# Altium PCB PCB1 - Copy.PcbDoc (part 1 of 2)
Units mil, origin at the board's own origin, x right, y up, seen from the top; angles counter-clockwise.
Board outline 4250 x 4000 mil, 2 copper layers (Top Layer, Bottom Layer); 130 components, 77 nets, 452 pads, 327 vias.
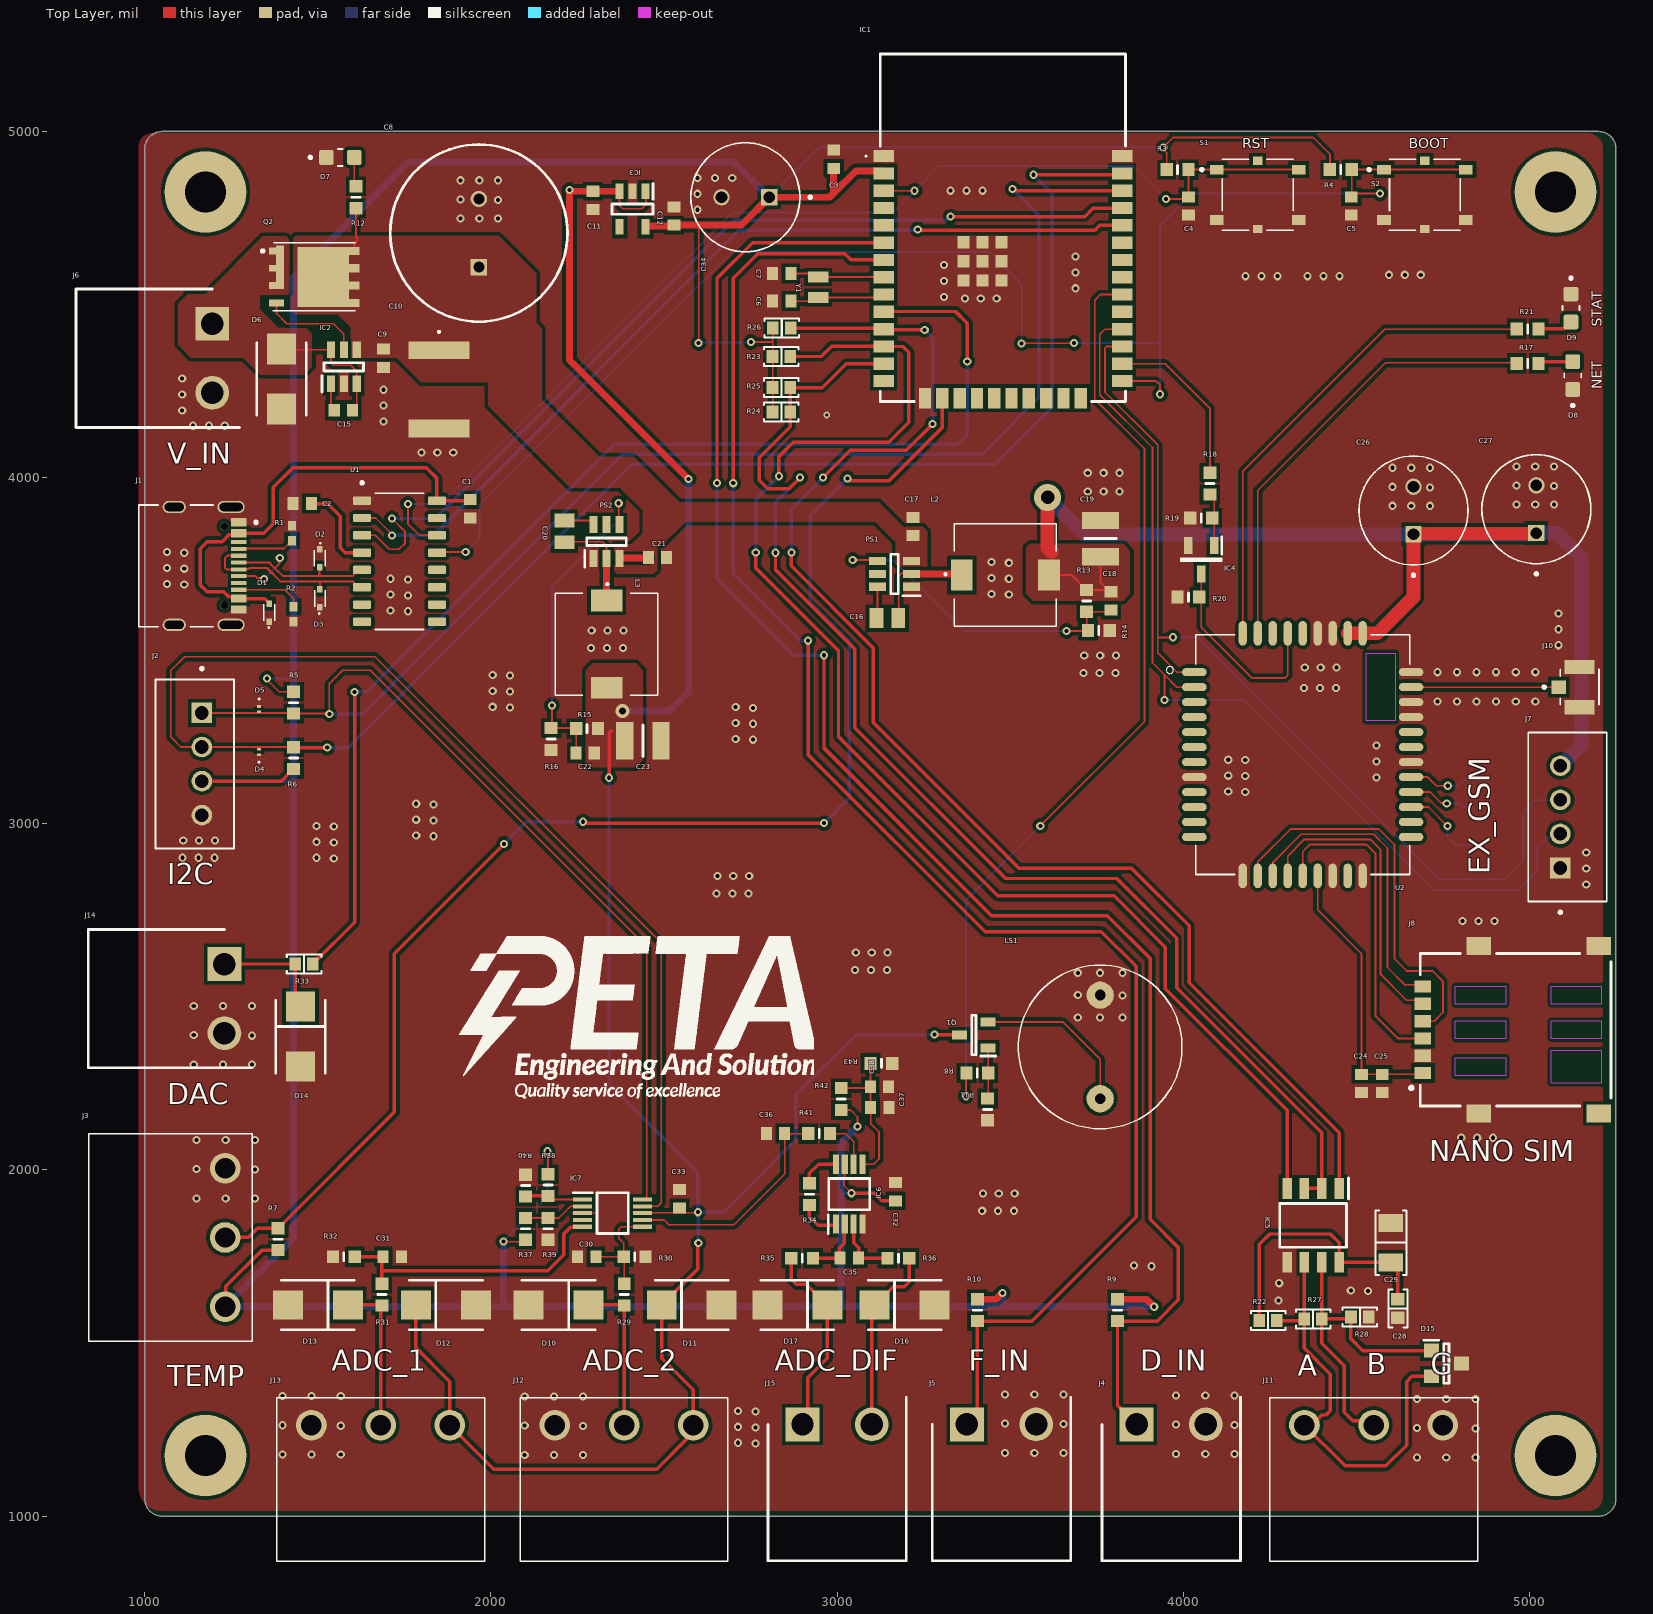
[diagram p0: Top Layer view]
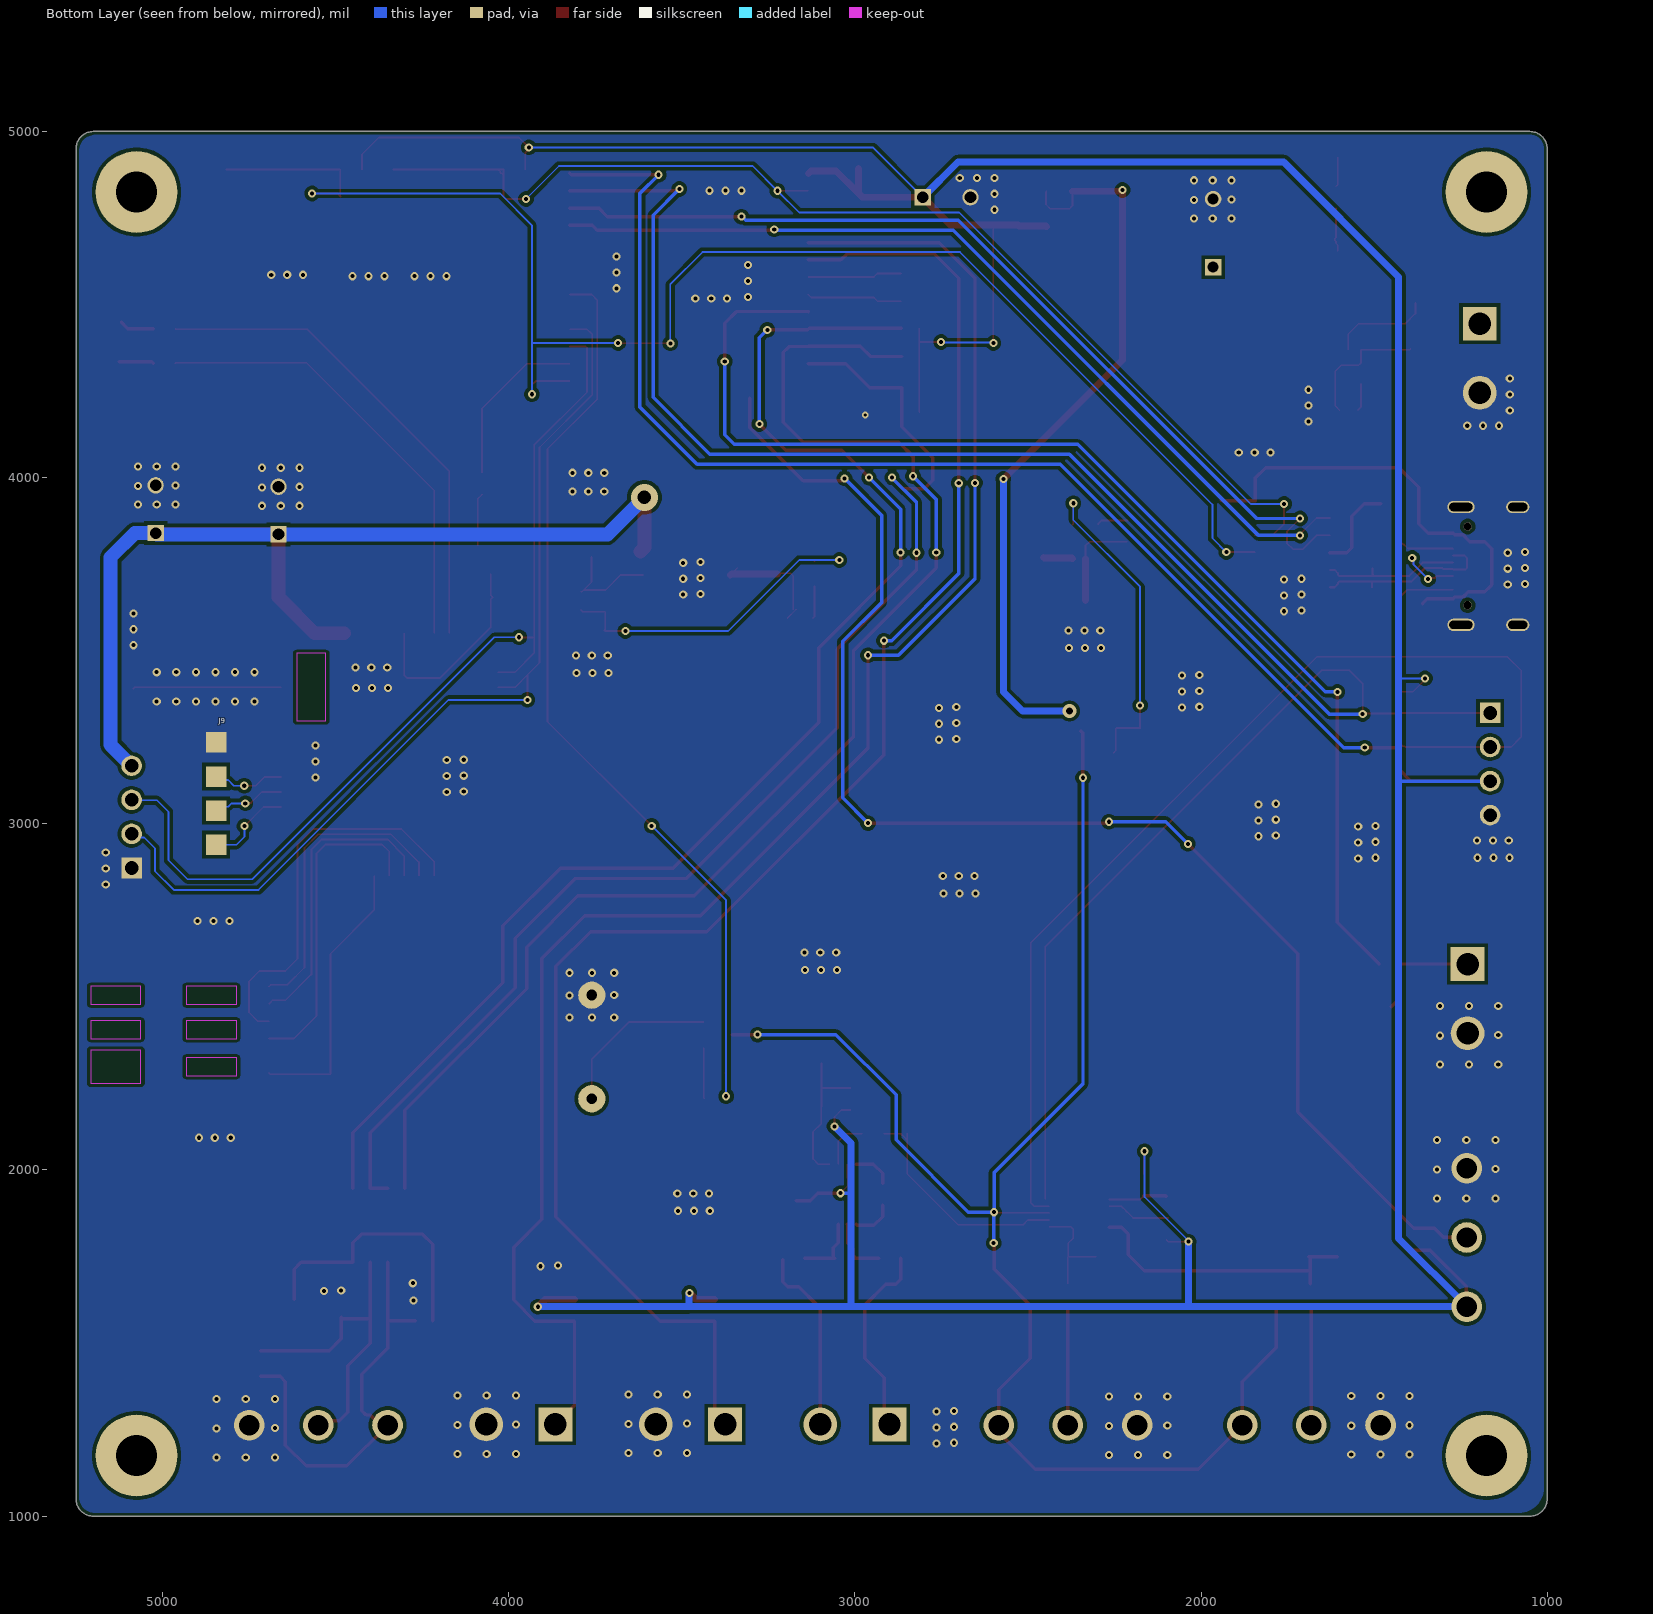
[diagram p1: Bottom Layer view, seen from below]
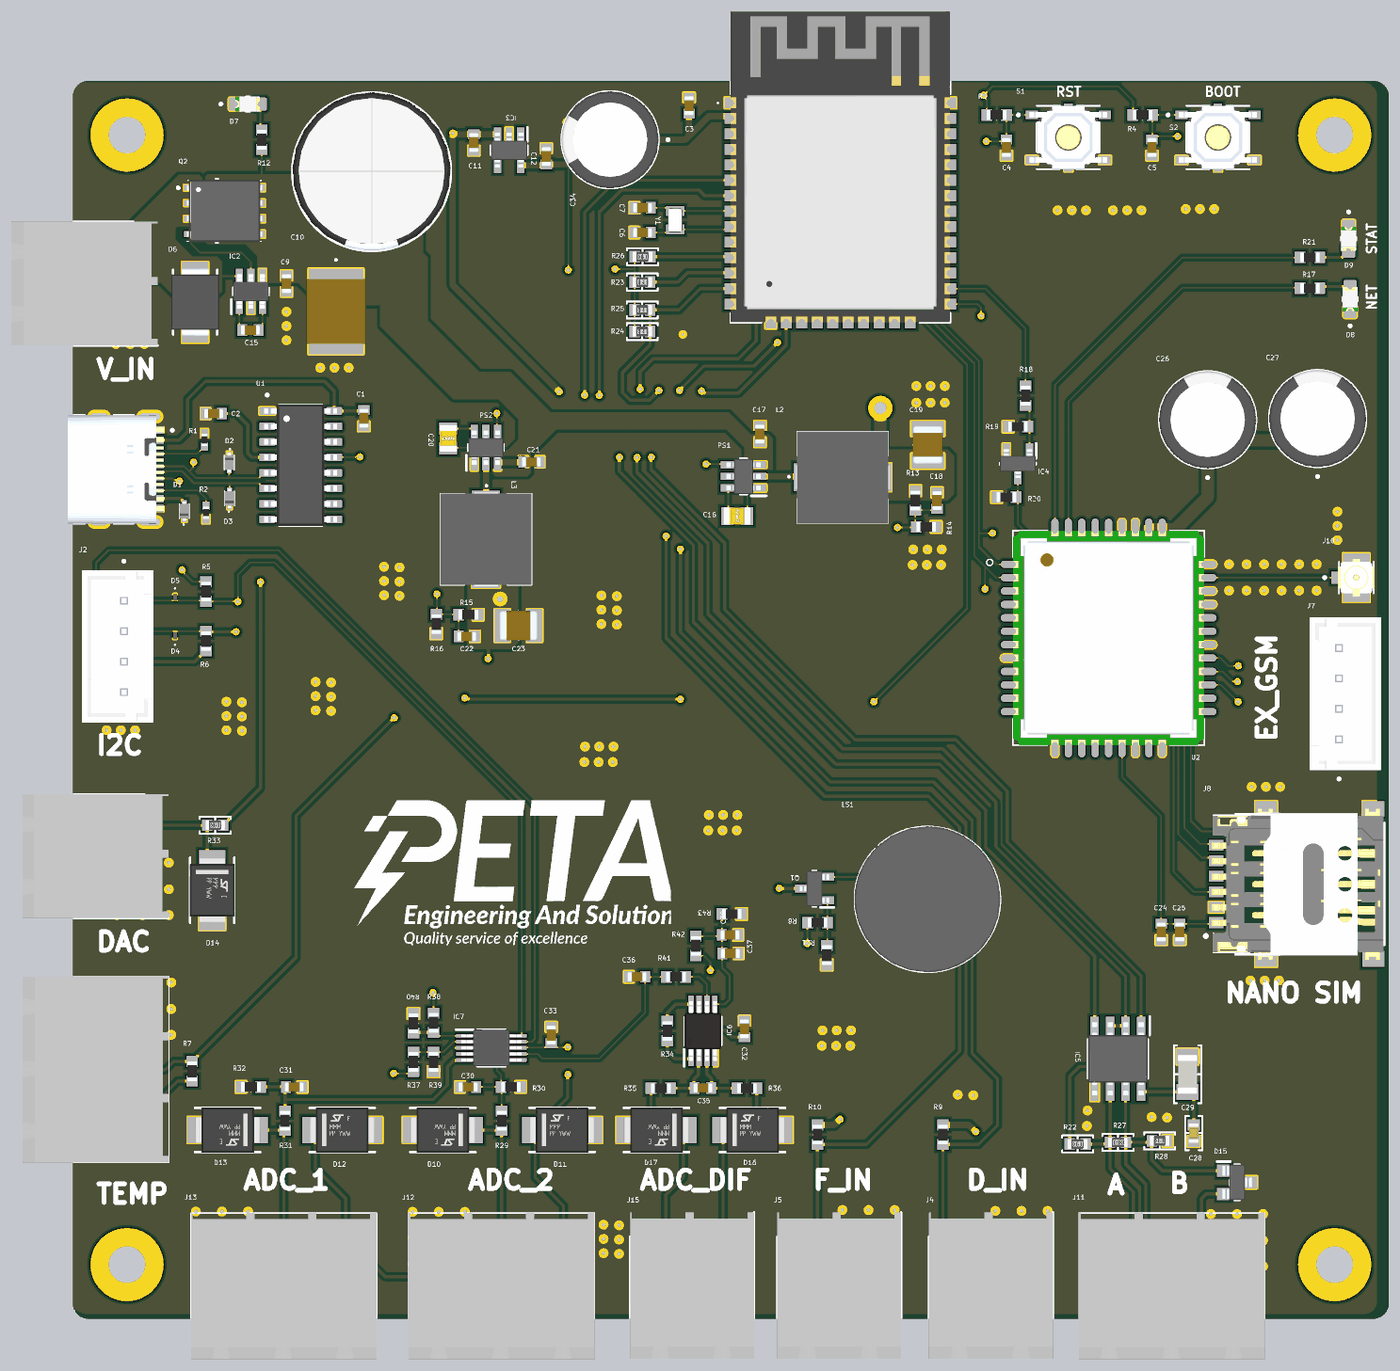
[diagram p3: 3D render of the assembled board from above, using the file's embedded part models]

## Layer stack, top to bottom
Top Solder: solder mask 0.4, Solder Resist, Dk 3.5
Top Layer: signal copper 1.4
Dielectric 1: dielectric 12.6, FR-4, Dk 4.8
Bottom Layer: signal copper 1.4
Bottom Solder: solder mask 0.4, Solder Resist, Dk 3.5

## Board outline
1050,1000 cw(c1050,1050) 1000,1050 1000,4950 cw(c1050,4950) 1050,5000 5200,5000 cw(c5200,4950) 5250,4950 5250,1050 cw(c5200,1050) 5200,1000

## Design rules (kind name [scope] priority, off if disabled: settings)
Clearance [All] p1: gap=10 ignorepadtopadclearanceinfootprint=FALSE except(0: Arc-Hole Track-Hole SMDPad-Hole THPad-Hole Via-Hole Fill-Hole Poly-Hole Region-Hole Text-Hole)
DiffPairsRouting [All] p1: maxlimit=19.68 minlimit=5.91 mostfreqgap=10 toplayer_minwidth=5.91 toplayer_maxwidth=15 toplayer_prefwidth=15 bottomlayer_minwidth=5.91 bottomlayer_maxwidth=15 bottomlayer_prefwidth=15 maxuncoupledlength=500
PlaneConnect [All] p1: planeconnectstyle=Direct reliefexpansion=20 reliefentries=4 reliefconductorwidth=10 reliefairgap=10
PolygonConnect [All] p1: connectstyle=Direct reliefconductorwidth=10 reliefentries=4 polygonreliefangle="90 Angle" airgapwidth=10
RoutingVias [All] p1: holewidth=11.81 width=23.62 viastyle="Through Hole" minholewidth=11.81 minwidth=23.62 maxholewidth=118.11 maxwidth=236.22
SolderMaskExpansion [All] p1: expansion=4 istentingtop=FALSE
Width [All] p1: maxlimit=80 minlimit=5 preferedwidth=10
28 further rules are at their usual default settings.

## Classes and differential pairs
component class DAC_OUT: D14 J14 R33
component class RS485: C28 C29 D15 IC5 J11 R22 R23 R24 R25 R26 R27 R28
component class PWR: C8 C9 C10 C11 C12 C15 C16 C17 C18 C19 C20 C21 C22 C23 D6 D7 IC2 IC3 J6 L2 L3 PS1 PS2 Q2 R12 R13 R14 R15 R16
component class programmer: C1 C2 D1 D2 D3 J1 R1 R2 U1
component class MCU: C3 C4 C5 C6 C7 C34 D4 D5 IC1 J2 J3 J4 J5 LS1 Q1 R3 R4 R5 R6 R7 R8 R9 R10 R11 S1 S2 Y1
component class GSM: C24 C25 C26 C27 D8 D9 IC4 J7 J8 J9 J10 R17 R18 R19 R20 R21 U2
component class ADC: C30 C31 C32 C33 C35 C36 C37 C38 D10 D11 D12 D13 D16 D17 IC6 IC7 J12 J13 J15 R29 R30 R31 R32 R34 R35 R36 R37 R38 R39 R40 R41 R42 R43
differential pair USB: +USB_P -USB_N

## Components (designator, comment, footprint, x,y, rotation, side; value= is the part's Value field where it differs from the comment)
C1 "0.1 uF" CAP0603 1940,3910 r90 top
C2 "0.1 uF" CAP0603 1455,3925 r0 top
C3 "0.1 uF" CAP0603 2990,4920 r90 top
C4 "0.1 uF" CAP0603 4015,4785 r270 top
C5 "0.1 uF" CAP0603 4485,4785 r270 top
C6 "1.5 pF" CAP0603 2840,4510 r0 top
C7 "1.5 pF" CAP0603 2840,4590 r0 top
C8 "MAL213651471E3" CAPPRD500W60D1300H2700 1965,4608.15 r90 top
C9 "2.2 uF" CAP0603 1690,4345 r90 top
C10 "C5750X5R1H106K230KA" C5750_Commercial 1850,4255 r270 top
C11 "2.2 uF" CAP0603 2295,4801 r270 top
C12 "2.2 uF" CAP0603 2529,4756 r90 top
C15 "0.1 uF" CAP0603 1573.62,4195 r180 top
C16 "C0805C104M5RAC-TU" CAPC2012X88N 3145,3594 r180 top
C17 "C5750X5R1H106K230KA" CAP0603 3219,3859 r270 top
C18 "GRM0335C1E560JA01D" CAP0603 3791,3644 r90 top
C19 "GRM32ER61C476KE15L" CAPC3225X270N 3761,3824 r270 top
C20 "C0805C104M5RAC-TU" CAPC2012X88N 2212,3845 r90 top
C21 "C5750X5R1H106K230KA" CAP0603 2481,3769 r180 top
C22 "CGA1A2C0G1E820J030BA" CAP0603 2272,3205 r0 top
C23 "GRM32ER61C476KE15L" CAPC3225X270N 2439,3240 r180 top
C24 "2.2 uF" CAP0603 4515,2250 r90 top
C25 "2.2 uF" CAP0603 4575,2250 r90 top
C26 "470 uF" CAPPRD350W60D800H1150 4665,3905 r90 top
C27 "470 uF" CAPPRD350W60D800H1150 5020,3908.9 r90 top
C28 "0.1 µF" "CAP 0603_1608" 4620,1600 r90 top
C29 "10µF" "CAP 1206_3216 - 1.8MM" 4600,1790 r270 top
C30 "0.1 uF" CAP0603 2276.89,1749.06 r180 top locked
C31 "0.1 uF" CAP0603 1715,1749.06 r0 top locked
C32 "0.1 uF" CAP0603 3169,1937 r90 top
C33 "0.1 uF" CAP0603 2545,1917 r90 top
C34 "470 uF" CAPPRD350W60D800H1150 2735,4810 r180 top
C35 "0.1 uF" CAP0603 3035,1746 r0 top
C36 "10 uF" CAP0603 2822,2105.2 r180 top
C37 "10 uF" CAP0603 3123.44,2180.5 r0 top
C38 "0.1 uF" CAP0603 3122.44,2240.5 r0 top
D1 "LESD5D5.0CT1G" LESD5D50CT1G 1360,3610 r90 top
D2 "LESD5D5.0CT1G" LESD5D50CT1G 1505,3767 r270 top
D3 "LESD5D5.0CT1G" LESD5D50CT1G 1506,3651 r90 top
D4 "DESD3V3Z1BCSF-7" DESD3V3Z1BCSF7 1330,3207.87 r90 top
D5 "DESD3V3Z1BCSF-7" DESD3V3Z1BCSF7 1330,3331.13 r270 top
D6 "SMBJ24CA-13-F" DIONM5336X250N 1395,4285 r270 top
D7 "LED_SMD" LEDSC125X200X90-2N 1565,4925 r0 top
D8 "LED_SMD" LEDSC125X200X90-2N 5125,4295 r90 top
D9 "LED_SMD" LEDSC125X200X90-2N 5120,4490 r270 top
D10 "SMBJ5.0A" SMBJ12A 2195,1610 r180 top locked
D11 "SMBJ5.0A" SMBJ12A 2580,1610 r0 top locked
D12 "SMBJ5.0A" SMBJ12A 1870,1610 r0 top locked
D13 "SMBJ5.0A" SMBJ12A 1500,1610 r180 top locked
D14 "SMBJ5.0A" SMBJ12A 1450,2385 r270 top
D15 "SM712" SOT95P240X115-3N 4760,1441 r0 top
D16 "SMBJ5.0A" SMBJ12A 3195,1610 r0 top locked
D17 "SMBJ5.0A" SMBJ12A 2885,1610 r180 top locked
IC1 "ESP32-WROOM-32E-N8" ESP32WROOM32EN8 3478.94,4721.85 r0 top
IC2 "LM74700QDBVTQ1" SOT95P280X145-6N 1575,4320 r90 top
IC3 "AP2112K-1.2TRG1" SOT95P285X140-5N 2409,4776 r270 top
IC4 "MMBT2222ALT1G" SOT96P237X111-3N 4052,3763 r270 top
IC5 "MAX485ECSA+" SOIC127P600X175-8N 4375,1840 r270 top
IC6 "INA317IDGKR" SOP65P490X110-8N 3035,1930 r90 top
IC7 "ADS1115IDGSR" SOP50P490X110-10N 2351.61,1875.32 r0 top
J1 "TYPE-C-31-M-12" HRO_TYPE-C-31-M-12 1085,3745 r270 top
J2 "DISPLAY" JST_B4B-XH-A(LF)(SN) 1144.33,3172.64 r90 top locked
J3 "DS18B20/PT100" 2828153 1231.97,2005 r270 top locked
J4 "Digital" SHDRRA2W102P0X508_1X2_1016X1200X850P 3865,1265 r180 top locked
J5 "FLOAT SNS" SHDRRA2W102P0X508_1X2_1016X1200X850P 3375,1265 r180 top locked
J6 "282815-2" SHDRRA2W102P0X508_1X2_1016X1200X850P 1195,4445 r90 top
J7 "EX_SIM" JST_B4B-XH-A(LF)(SN) 5110,3020 r270 top
J8 "SIM8060-6-1-14-00-A" GCT_SIM8060-6-1-14-00-A 4960,2405 r90 top
J9 "SMD_SWD" SMD_SWD 4846.98,3234.78 r270 bottom
J10 "CONUFL001-SMD" LINX_CONUFL001-SMD 5145,3395 r270 top
J11 "282815-3" 2828153 4350,1263.03 r0 top locked
J12 "282815-3" 2828153 2184.7,1263.03 r0 top locked
J13 "282815-3" 2828153 1481.36,1263.03 r0 top locked
J14 "282815-2" SHDRRA2W102P0X508_1X2_1016X1200X850P 1230,2595 r90 top locked
J15 "282815-2" SHDRRA2W102P0X508_1X2_1016X1200X850P 2900,1265 r180 top locked
L2 "PA4302.103NLT" PA4302103NLT 3486,3719 r90 top
L3 "PA4302.103NLT" PA4302103NLT 2334,3519.02 r0 top
LS1 "CMI-1295IC-0585T" CMI1295IC0585T 3760,2205.79 r90 top
PS1 "TPS54202DDCR" SOT95P280X110-6N 3166,3722 r180 top
PS2 "TPS54202DDCR" SOT95P280X110-6N 2334,3815 r90 top
Q1 "DMG3415U-7" SOT96P240X110-3N 3395,2390 r180 top
Q2 "BSC014N06NSATMA1" BSC010N04LS6ATMA1 1490,4580 r270 top
R1 "CRCW0402100KFKEDHP" RESC1005X40N 1425.16,3840 r90 top
R2 "CRCW0402100KFKEDHP" RESC1005X40N 1430,3605 r90 top
R3 "10K" RES0603 3983.5,4890 r180 top
R4 "10K" RES0603 4455,4890 r180 top
R5 "4.7K" RES0603 1430,3350 r90 top
R6 "4.7K" RES0603 1430,3190 r270 top
R7 "4.7K" RES0603 1385,1800 r270 top
R8 "300R" RES0603 3405,2280 r180 top
R9 "4.7K" RES0603 3810,1595 r90 top
R10 "4.7K" RES0603 3405,1595 r90 top
R11 "10K" RES0603 3435,2175 r270 top
R12 "1K" RES0603 1610,4810 r90 top
R13 "CRCW0402100KFKEDHP" RES0603 3721,3644 r90 top
R14 "CRCW040216K9FKEDHP" RES0603 3756,3559 r180 top
R15 "CRCW0402100KFKEDHP" RES0603 2277.5,3275 r0 top
R16 "CRCW040213K7FKEDHP" RES0603 2174,3245 r90 top
R17 "1K" RES0603 4995,4330 r0 top
R18 "4.7K" RES0603 4077,3983 r90 top
R19 "47K" RES0603 4052,3883 r0 top
R20 "NC" RES0603 4015,3655 r180 top
R21 "1K" RES0603 4995,4430 r0 top
R22 "20 kOhms" "RES 0603_1608" 4245,1565 r180 top
R23 "10 kOhms" "RES 0603_1608" 2839,4350 r180 top
R24 "10 kOhms" "RES 0603_1608" 2839,4190 r180 top
R25 "10 kOhms" "RES 0603_1608" 2839,4260 r180 top
R26 "10 kOhms" "RES 0603_1608" 2840,4432 r180 top
R27 "120" "RES 0603_1608" 4375,1570 r0 top
R28 "20 kOhms" "RES 0603_1608" 4510,1575 r180 top
R29 "68k" RES0603 2385,1640 r90 top locked
R30 "10K" RES0603 2415,1749.25 r0 top locked
R31 "68k" RES0603 1685,1640 r90 top locked
R32 "10K" RES0603 1575,1749.25 r180 top locked
R33 "10 kOhms" "RES 0603_1608" 1460,2595 r180 top
R34 "100R" RES0603 2920,1930 r90 top
R35 "100R" RES0603 2899,1745 r0 top
R36 "100R" RES0603 3177,1745 r180 top
R37 "10K" RES0603 2100,1830 r90 top
R38 "10K" RES0603 2165,1956.5 r270 top
R39 "NC" RES0603 2165,1830 r270 top
R40 "NC" RES0603 2100,1955 r90 top
R41 "10K" RES0603 2948,2105 r180 top
R42 "10K" RES0603 3012,2205 r270 top
R43 "10K" RES0603 3128,2308 r180 top
S1 "PTS526_SMG15_SMTR2_LFS" SW_PTS526_SMG15_SMTR2_LFS 4215,4817.17 r0 top
S2 "PTS526_SMG15_SMTR2_LFS" SW_PTS526_SMG15_SMTR2_LFS 4698.11,4817.17 r0 top
U1 "CH340C" SOIC127P600X180-16N 1735.78,3758.43 r0 top
U2 "SIM800C" LCC110P1570X1760X250-42N 4345,3200 r0 top
Y1 "CM8V-T1A-32.768KHZ-6PF-20PPM-TA-QC" XTAL_CM8V-T1A-32.768KHZ-6PF-20PPM-TA-QC 2945,4550 r270 top

## Footprints (in the part's own frame and the unit in brackets; to place one, negate y for a bottom-side part, rotate by r counter-clockwise, add the part's x,y. Pads: shape width x height; smd on the part's side, far side on the other; paste and mask are expansions set on the pad)
2828153 [mm]
  round 2.25 hole 1.5: 1(0,0) 2(5.08,0) 3(10.16,0)
  silkscreen extent -2.54,-10 12.7,2, body extent -2.54,-10 12.7,2, height 8.46
BSC010N04LS6ATMA1 [mm]
  rect 0.5x0.5 smd: 1(-1.905,-3.075) 2(-0.635,-3.075) 3(0.635,-3.075)
  rect 0.5x1.1 smd: 4(1.905,-2.775)
  rect 0.6x0.8 smd: 5(1.905,2.925) 6(0.635,2.925) 7(-0.635,2.925) 8(-1.905,2.925)
  rect 4.41x3.75 smd: 9(0,0.65)
  rect 3.2x0.6 smd: 10(-0.715,-2.525)
  silkscreen extent -2.5,-3.9 2.5,3, body extent -2.7,-3.08 2.7,3.08, height 1.1
C5750_Commercial [mm]
  rect 1.3x4.5 smd: 1(-2.875,0) 2(2.875,0)
  silkscreen extent -4.27,-0.05 -4.18,0.05, body extent -2.65,-2.45 2.65,2.45, height 2.77
CAP0603 [mm]
  rect 0.81x0.94 smd: 1(-0.67,0) 2(0.67,0)
  body extent -0.8,-0.4 0.8,0.4, height 0.9
"CAP 0603_1608" [mm]
  rect 0.9x1 smd: 1(-0.675,0) 2(0.675,0)
  silkscreen extent -1.4,-0.7 1.4,0.7, body extent -0.8,-0.41 0.8,0.41, height 0.82
"CAP 1206_3216 - 1.8MM" [mm]
  rect 1.3x1.8 smd: 1(-1.45,0) 2(1.45,0)
  silkscreen extent -2.37,-1.12 2.37,1.12, body extent -1.6,-0.8 1.6,0.8, height 1.8
CAPC2012X88N [mm]
  rect 1.02x1.47 smd: 1(-0.8,0) 2(0.8,0)
  body extent -1.1,-0.73 1.1,0.72, height 0.88
CAPC3225X270N [mm]
  rect 1.26x2.72 smd: 1(-1.33,0) 2(1.33,0)
  silkscreen extent 0,-1.15 0,1.15, body extent -1.6,-1.25 1.6,1.25, height 2.7
CAPPRD350W60D800H1150 [mm]
  round 1.2 hole 0.85: N(1.75,0)
  rect 1.2x1.2 / inner round 1.2 / far side rect 1.2x1.2 hole 0.85: P(-1.75,0)
  silkscreen extent -4.85,-4 4,4, body extent -4,-4 4,4, height 11.5
CAPPRD500W60D1300H2700 [mm]
  rect 1.2x1.2 hole 0.8: 1(0,0)
  round 1.2 hole 0.8: 2(5,0)
  silkscreen extent -4,-6.5 9,6.5, body extent -3.96,-6.49 9.03,6.49, height 25
CMI1295IC0585T [mm]
  round 2 hole 0.8: 1(0,0) 2(7.6,0)
  silkscreen extent -2.2,-6 9.8,6, body extent -2.19,-5.99 9.81,6, height 9.63
DESD3V3Z1BCSF7 [mm]
  rect 0.194x0.291 smd: 1(-0.2,0) 2(0.2,0)
  silkscreen extent -0.8,-0.05 -0.7,0.05, body extent -0.3,-0.15 0.3,0.15, height 0.42
DIONM5336X250N [mm]
  rect 2.25x2.15 smd: 1(-2.2,0) 2(2.2,0)
  silkscreen extent -2.65,-1.81 2.65,1.81, body extent -2.8,-1.97 2.8,1.97, height 2.57
ESP32WROOM32EN8 [mm]
  rect 1.5x0.9 smd: 1(-8.75,5.26) 2(-8.75,3.99) 3(-8.75,2.72) 4(-8.75,1.45) 5(-8.75,0.18) 6(-8.75,-1.09) 7(-8.75,-2.36) 8(-8.75,-3.63) 9(-8.75,-4.9) 10(-8.75,-6.17) 11(-8.75,-7.44) 12(-8.75,-8.71) 13(-8.75,-9.98) 14(-8.75,-11.25) 25(8.75,-11.25) 26(8.75,-9.98) 27(8.75,-8.71) 28(8.75,-7.44) 29(8.75,-6.17) 30(8.75,-4.9) 31(8.75,-3.63) 32(8.75,-2.36) 33(8.75,-1.09) 34(8.75,0.18) 35(8.75,1.45) 36(8.75,2.72) 37(8.75,3.99) 38(8.75,5.26)
  rect 0.9x1.5 smd: 15(-5.715,-12.5) 16(-4.445,-12.5) 17(-3.175,-12.5) 18(-1.905,-12.5) 19(-0.635,-12.5) 20(0.635,-12.5) 21(1.905,-12.5) 22(3.175,-12.5) 23(4.445,-12.5) 24(5.715,-12.5)
  rect 0.9x0.9 smd: 39(-2.9,-1.06) 40(-2.9,-2.46) 41(-2.9,-3.86) 42(-1.5,-3.86) 43(-0.1,-3.86) 44(-0.1,-2.46) 45(-0.1,-1.06) 46(-1.5,-1.06) 47(-1.5,-2.46)
  silkscreen extent -10.1,-12.75 9,12.75, body extent -9,-12.75 9,12.75, height 3.13
GCT_SIM8060-6-1-14-00-A [mm]
  rect 0.9x1.2 smd: C1(-3.175,6.8) C2(-0.635,6.8) C3(1.905,6.8) C5(-1.905,6.8) C6(0.635,6.8) C7(3.175,6.8)
  rect 1.3x1.8 smd: S1(-6.15,2.7) S2(6.15,2.7) S3(6.15,-6.1) SW(-6.15,-6.1)
  Keep-Out Layer region: 3.19,-6.3 1.89,-6.3 1.89,-2.6 3.19,-2.6
  Keep-Out Layer region: 0.65,-6.3 -0.65,-6.3 -0.65,-2.6 0.65,-2.6
  Keep-Out Layer region: -1.49,-6.3 -3.93,-6.3 -3.93,-2.6 -1.49,-2.6
  Keep-Out Layer region: 3.19,0.72 1.89,0.72 1.89,4.42 3.19,4.42
  Keep-Out Layer region: 0.65,0.72 -0.65,0.72 -0.65,4.42 0.65,4.42
  Keep-Out Layer region: -2.06,0.72 -3.36,0.72 -3.36,4.42 -2.06,4.42
  Keep-Out Layer region: 3.19,-6.3 1.89,-6.3 1.89,-2.6 3.19,-2.6
  Keep-Out Layer region: 0.65,-6.3 -0.65,-6.3 -0.65,-2.6 0.65,-2.6
  Keep-Out Layer region: -1.49,-6.3 -3.93,-6.3 -3.93,-2.6 -1.49,-2.6
  Keep-Out Layer region: 3.19,0.72 1.89,0.72 1.89,4.42 3.19,4.42
  Keep-Out Layer region: 0.65,0.72 -0.65,0.72 -0.65,4.42 0.65,4.42
  Keep-Out Layer region: -2.06,0.72 -3.36,0.72 -3.36,4.42 -2.06,4.42
  silkscreen extent -5.6,-7 5.6,7.76, body extent -6.22,-6.92 6.18,7.18, height 1.4
HRO_TYPE-C-31-M-12 [mm]
  rect 0.6x1.14 smd mask+0.05: A1_B12(-3.2,4.75) A4_B9(-2.4,4.75) B1_A12(3.2,4.75) B4_A9(2.4,4.75)
  rect 0.3x1.14 smd mask+0.05: A5(-1.25,4.75) A6(-0.25,4.75) A7(0.25,4.75) A8(1.25,4.75) B5(1.75,4.75) B6(0.75,4.75) B7(-0.75,4.75) B8(-1.75,4.75)
  oval 0.9x2 hole 0.6 slot 1.7 at 90 deg: S1(-4.325,4.17) S2(4.325,4.17)
  oval 0.9x1.7 hole 0.6 slot 1.4 at 90 deg: S3(-4.325,0) S4(4.325,0)
  round 0.6 hole 0.6 unplated: ""(-2.89,3.68) ""(2.89,3.68)
  silkscreen extent -4.47,-2.6 4.47,6.1, body extent -4.47,-2.6 4.47,5.31, height 3.31
JST_B4B-XH-A(LF)(SN) [mm]
  rect 1.508x1.508 / inner round 1.508 / far side rect 1.508x1.508 hole 1: 1(3.75,-0.525)
  round 1.508 hole 1: 2(1.25,-0.525) 3(-1.25,-0.525) 4(-3.75,-0.525)
  silkscreen extent -6.2,-2.88 7.1,2.88, body extent -6.2,-2.88 6.2,2.88, height 7
LCC110P1570X1760X250-42N [mm]
  oval 1.8x0.6 smd: 1(-7.95,6.05) 2(-7.95,4.95) 3(-7.95,3.85) 4(-7.95,2.75) 5(-7.95,1.65) 6(-7.95,0.55) 7(-7.95,-0.55) 8(-7.95,-1.65) 9(-7.95,-2.75) 10(-7.95,-3.85) 11(-7.95,-4.95) 12(-7.95,-6.05) 22(7.95,-6.05) 23(7.95,-4.95) 24(7.95,-3.85) 25(7.95,-2.75) 26(7.95,-1.65) 27(7.95,-0.55) 28(7.95,0.55) 29(7.95,1.65) 30(7.95,2.75) 31(7.95,3.85) 32(7.95,4.95) 33(7.95,6.05)
  oval 0.6x1.8 smd: 13(-4.4,-8.9) 14(-3.3,-8.9) 15(-2.2,-8.9) 16(-1.1,-8.9) 17(0,-8.9) 18(1.1,-8.9) 19(2.2,-8.9) 20(3.3,-8.9) 21(4.4,-8.9) 34(4.4,8.9) 35(3.3,8.9) 36(2.2,8.9) 37(1.1,8.9) 38(0,8.9) 39(-1.1,8.9) 40(-2.2,8.9) 41(-3.3,8.9) 42(-4.4,8.9)
  Keep-Out Layer region: 6.8,2.483 4.656,2.483 4.656,7.43 6.8,7.43
  silkscreen extent -10,-8.8 7.85,8.8, body extent -7.85,-8.8 7.85,8.8, height 2.5
LEDSC125X200X90-2N [mm]
  rrect25% 1.07x1.08 smd: A(1.025,0) C(-1.025,0)
  silkscreen extent -2.3,-0.63 0.17,0.63, body extent -1,-0.63 1,0.63, height 0.7
LESD5D50CT1G [mm]
  rect 0.48x0.4 smd: 1(-0.66,0) 2(0.66,0)
  silkscreen extent -1.15,-0.4 0.6,0.4, body extent -0.8,-0.4 0.8,0.4, height 0.6
LINX_CONUFL001-SMD [mm]
  rect 1x1.05 smd: 1(0,-1.525)
  rect 1.05x2.2 smd: 2(-1.475,0) 3(1.475,0)
  silkscreen extent -1.3,-2.7 1.3,1.42, body extent -1.55,-1.5 1.55,1.5, height 1.3
PA4302103NLT [mm]
  rect 2.3x1.6 smd: 1(0,3.2) 2(0,-3.2)
  silkscreen extent -3.75,-3.75 3.75,4.45, body extent -3.75,-3.84 3.75,3.84, height 5.7
RES0603 [mm]
  rect 0.9x0.95 smd: 1(-0.8,0) 2(0.8,0)
  silkscreen extent 0,-0.3 0,0.3, body extent -0.8,-0.4 0.8,0.4, height 0.55
"RES 0603_1608" [mm]
  rect 0.85x0.95 smd: 1(-0.65,0) 2(0.65,0)
  silkscreen extent -1.27,-0.7 1.27,0.7, body extent -0.8,-0.4 0.8,0.4, height 0.45
RESC1005X40N [mm]
  rect 0.7x0.6 smd: 1(-0.55,0) 2(0.55,0)
  body extent -0.5,-0.25 0.5,0.25, height 0.4
SHDRRA2W102P0X508_1X2_1016X1200X850P [mm]
  rect 2.475x2.475 hole 1.65: 1(0,0)
  round 2.475 hole 1.65: 2(-5.08,0)
  silkscreen extent -7.62,-2 2.54,10, body extent -7.62,-2 2.54,10, height 8.35
SMBJ12A [mm]
  rect 2.2x2.15 smd: 1(-2.2,0) 2(2.2,0)
  silkscreen extent -2.68,-1.81 2.68,1.81, body extent -2.68,-1.86 2.68,1.86, height 2.33
SMD_SWD [mil]
  rect 59.37x59.37 smd: 1(-0.22,1.98) 2(98.2,1.98) 3(196.63,1.98) 4(295.05,1.98)
SOIC127P600X175-8N [mm]
  rect 1.525x0.7 smd: 1(-2.712,1.905) 2(-2.712,0.635) 3(-2.712,-0.635) 4(-2.712,-1.905) 5(2.712,-1.905) 6(2.712,-0.635) 7(2.712,0.635) 8(2.712,1.905)
  silkscreen extent -3.47,-2.45 1.6,2.61, body extent -3,-2.45 3,2.45, height 1.75
SOIC127P600X180-16N [mm]
  rrect25% 1.31x0.62 smd: 1(-2.75,4.445) 2(-2.75,3.175) 3(-2.75,1.905) 4(-2.75,0.635) 5(-2.75,-0.635) 6(-2.75,-1.905) 7(-2.75,-3.175) 8(-2.75,-4.445) 9(2.75,-4.445) 10(2.75,-3.175) 11(2.75,-1.905) 12(2.75,-0.635) 13(2.75,0.635) 14(2.75,1.905) 15(2.75,3.175) 16(2.75,4.445)
  silkscreen extent -2.85,-5 1.78,5.85, body extent -3,-5 3,5, height 1.8
SOP50P490X110-10N [mm]
  rect 1.4x0.3 smd: 1(-2.2,1) 2(-2.2,0.5) 3(-2.2,0) 4(-2.2,-0.5) 5(-2.2,-1) 6(2.2,-1) 7(2.2,-0.5) 8(2.2,0) 9(2.2,0.5) 10(2.2,1)
  silkscreen extent -2.9,-1.5 1.15,1.5, body extent -2.46,-1.5 2.46,1.5, height 1.1
SOP65P490X110-8N [mm]
  rect 1.4x0.45 smd: 1(-2.2,0.975) 2(-2.2,0.325) 3(-2.2,-0.325) 4(-2.2,-0.975) 5(2.2,-0.975) 6(2.2,-0.325) 7(2.2,0.325) 8(2.2,0.975)
  silkscreen extent -2.9,-1.5 1.15,1.55, body extent -2.45,-1.5 2.45,1.5, height 1.1
SOT95P240X115-3N [mm]
  rect 1.1x1 smd: 1(-1.1,0.95) 2(-1.1,-0.95) 3(1.1,0)
  silkscreen extent -1.65,-1.45 0.2,1.7, body extent -1.2,-1.45 1.2,1.45, height 1.15
SOT95P280X110-6N [mm]
  rect 1.25x0.6 smd: 1(-1.25,0.95) 2(-1.25,0) 3(-1.25,-0.95) 4(1.25,-0.95) 5(1.25,0) 6(1.25,0.95)
  silkscreen extent -1.88,-1.45 0.28,1.6, body extent -1.4,-1.45 1.4,1.45, height 1.1
SOT95P280X145-6N [mm]
  rect 1.2x0.6 smd: 1(-1.25,0.95) 2(-1.25,0) 3(-1.25,-0.95) 4(1.25,-0.95) 5(1.25,0) 6(1.25,0.95)
  silkscreen extent -1.85,-1.45 0.3,1.6, body extent -1.4,-1.45 1.4,1.45, height 1.2
SOT95P285X140-5N [mm]
  rect 1.15x0.6 smd: 1(-1.3,0.95) 2(-1.3,0) 3(-1.3,-0.95) 4(1.3,-0.95) 5(1.3,0.95)
  silkscreen extent -1.88,-1.5 0.38,1.5, body extent -1.43,-1.5 1.43,1.5, height 1.4
SOT96P237X111-3N [mm]
  rect 1.25x0.6 smd: 1(-1.05,0.955) 2(-1.05,-0.955) 3(1.05,0)
  silkscreen extent -1.68,-1.46 0.08,1.51, body extent -1.18,-1.46 1.18,1.46, height 1.11
SOT96P240X110-3N [mm]
  rect 1.1x0.65 smd: 1(-1.05,0.96) 2(-1.05,-0.96) 3(1.05,0)
  silkscreen extent -1.6,-1.45 0.15,1.54, body extent -1.2,-1.45 1.2,1.45, height 1.1
SW_PTS526_SMG15_SMTR2_LFS [mm]
  rect 1x0.7 smd: 1(-3,1.85) 2(3,1.85) 3(-3,-1.85) 4(3,-1.85)
  rect 0.7x0.6 smd: G1(0,2.5) G2(0,-2.5)
  silkscreen extent -4.2,-2.6 2.6,2.6, body extent -3.2,-2.6 3.2,2.6, height 1.7
XTAL_CM8V-T1A-32.768KHZ-6PF-20PPM-TA-QC [mm]
  rect 0.8x1.5 smd: 1(-0.75,0) 2(0.75,0)
  body extent -1,-0.6 1,0.6, height 0.6

## Part data
C1 C2 C3 C4 C5 C6 C7 C9 C11 C12 C15 C24 C25 C30 C31 C32 C33 C35 C36 C37 C38: library part CC0603KRX7R9BB104, "Capacitor", Manufacturer_Name=YAGEO, Mouser Part Number=603-CC603KRX7R9BB104, Arrow Part Number=CC0603KRX7R9BB104, Arrow Price/Stock=https://www.arrow.com/en/products/cc0603krx7r9bb104/yageo?utm_currency=USD&region=europe, Datasheet Link=https://componentsearchengine.com/Datasheets/2/CC0603KRX7R9BB104.pdf, Height=0.9mm, Manufacturer_Part_Number=CC0603KRX7R9BB104, Mouser Price/Stock=https://www.mouser.co.uk/ProductDetail/YAGEO/CC0603KRX7R9BB104?qs=vTakOoo5QyLvVCYM2ge8LQ%3D%3D
C8: "Capacitor Polarised", Manufacturer_Name=Vishay, Mouser Part Number=594-2222-136-51471, Datasheet Link=https://www.mouser.co.uk/datasheet/2/427/136rvi-1762300.pdf, Height=27mm, Manufacturer_Part_Number=MAL213651471E3, Mouser Price/Stock=https://www.mouser.co.uk/ProductDetail/Vishay-BC-Components/MAL213651471E3?qs=zGH8QOQ14qXx9%252BWDTpPwWA%3D%3D
C10 C17 C21: "Capacitor", Manufacturer_Name=TDK, Mouser Part Number=810-C5750X5R1H106K, Arrow Part Number=C5750X5R1H106K230KA, Arrow Price/Stock=https://www.arrow.com/en/products/c5750x5r1h106k230ka/tdk?region=nac, Datasheet Link=https://product.tdk.com/system/files/dam/doc/product/capacitor/ceramic/mlcc/catalog/mlcc_commercial_general_en.pdf, Height=2.5mm, Manufacturer_Part_Number=C5750X5R1H106K230KA, Mouser Price/Stock=https://www.mouser.co.uk/ProductDetail/TDK/C5750X5R1H106K230KA?qs=NRhsANhppD8lVYAvl0MZ3g%3D%3D
C16 C20: "Capacitor", Manufacturer_Name="Yageo Group", Arrow Part Number=C0805C104M5RAC-TU, Arrow Price/Stock=https://www.arrow.com/en/products/c0805c104m5ractu/kemet-corporation?region=nac, Datasheet Link=https://connect.kemet.com:7667/gateway/IntelliData-ComponentDocumentation/1.0/download/specsheet/C0805C104M5RACTU, Height=0.88mm, Manufacturer_Part_Number=C0805C104M5RAC-TU
C18: "Capacitor", Manufacturer_Name="Murata Electronics", Mouser Part Number=81-GRM0335C1E560JA1D, Arrow Part Number=GRM0335C1E560JA01D, Arrow Price/Stock=https://www.arrow.com/en/products/grm0335c1e560ja01d/murata-manufacturing, Height=0.33mm, Manufacturer_Part_Number=GRM0335C1E560JA01D, Mouser Price/Stock=https://www.mouser.com/Search/Refine.aspx?Keyword=81-GRM0335C1E560JA1D
C19 C23: "Capacitor", Manufacturer_Name="Murata Electronics", Mouser Part Number=81-GRM32ER61C476KE5L, Arrow Part Number=GRM32ER61C476KE15L, Arrow Price/Stock=https://www.arrow.com/en/products/grm32er61c476ke15l/murata-manufacturing?utm_currency=USD&region=europe, Datasheet Link=https://search.murata.co.jp/Ceramy/image/img/A01X/G101/ENG/GRM32ER61C476KE15-01A.pdf, Height=2.7mm, Manufacturer_Part_Number=GRM32ER61C476KE15L, Mouser Price/Stock=https://www.mouser.co.uk/ProductDetail/Murata-Electronics/GRM32ER61C476KE15L?qs=%252B%2F7tQhzlcy7Im%2F1Gh2YSGQ%3D%3D
C22: "Capacitor", Manufacturer_Name=TDK, Datasheet Link=https://product.tdk.com/system/files/dam/doc/product/capacitor/ceramic/mlcc/catalog/mlcc_automotive_general_en.pdf, Height=0.33mm, Manufacturer_Part_Number=CGA1A2C0G1E820J030BA
C26 C27 C34: library part EEUFC1E221, "220F 25V Aluminum Electrolytic Capacitors Radial, Can 2000 Hrs @ 105C", Package="RADIAL-2 Panasonic", Availability="In Stock", Check_prices=https://www.snapeda.com/parts/EEUFC1E221/Panasonic/view-part/?ref=eda, MF=Panasonic, MP=EEUFC1E221, price=None, Purchase-URL=https://pricing.snapeda.com/search/part/EEUFC1E221/?ref=eda, SnapEDA_Link=https://www.snapeda.com/parts/EEUFC1E221/Panasonic/view-part/?ref=snap
C28: library part C0603C104K5RAC7411, "CAP CER 0.1UF 50V X7R 0603", Device Package="0603 (1608 Metric)", manufacturer=KEMET, Operating Temperature="-55°C ~ 125°C", Supplier Part Number 1=399-7374-2-ND, Temperature Coefficient=X7R, Tolerance=±10%, Voltage - Rated=50V, Applications="Bypass, Decoupling", Capacitance="0.1 µF", componentlink1description=Datasheet, componentlink1url=https://api.kemet.com/component-edge/download/datasheet/C0603C104K5RAC7411.pdf, componentlink2description="DigiKey Link", componentlink2url=https://www.digikey.com/en/products/detail/kemet/C0603C104K5RAC7411/3317013, lastupdated="9/19/2022 1:01:20 PM", Lifecycle Status=Active, Minimum Order=15000, Mounting Type="Surface Mount, MLCC", Package / Case="0603 (1608 Metric)", packaging=TapeAndReel, Part Number=C0603C104K5RAC7411, Part Status=Active, partid=2233, price=0.01, series="SMD Comm X7R", Size / Dimension="0.063\" L x 0.031\" W (1.60mm x 0.80mm)", Supplier 1=DigiKey, Thickness (Max)="0.035\" (0.90mm)"
C29: library part 12065D106KAT2A, "CAP CER 10UF 50V X5R 1206", Device Package="1206 (3216 Metric)", manufacturer="AVX Corporation", Operating Temperature="-55°C ~ 85°C", Supplier Part Number 1=478-9979-1-ND, Temperature Coefficient=X5R, Tolerance=±10%, Voltage - Rated=50V, Applications="General Purpose", Capacitance=10µF, componentlink1description=Datasheet, componentlink1url=http://datasheets.avx.com/cx5r.pdf, componentlink2description="DigiKey Link", componentlink2url=http://digikey.com/product-detail/en/avx-corporation/12065D106KAT2A/478-9979-1-ND/6149060, lastupdated="9/2/2020 1:05:35 AM", Lifecycle Status=Active, Minimum Order=1, Mounting Type="Surface Mount, MLCC", Package / Case="1206 (3216 Metric)", packaging=TapeAndReel, Part Number=12065D106KAT2A, Part Status=Active, partid=21345, price=0.16, series=-, Size / Dimension="0.126\" L x 0.063\" W (3.20mm x 1.60mm)", Supplier 1=DigiKey, Thickness (Max)="0.071\" (1.80mm)"
D1 D2 D3: "TVS Diode (Bi-directional)", Manufacturer_Name=LRC, Height=0.7mm, Manufacturer_Part_Number=LESD5D5.0CT1G
D4 D5: "TVS Diode (Bi-directional)", Manufacturer_Name="Diodes Incorporated", Mouser Part Number=621-DESD3V3Z1BCSF-7, Arrow Part Number=DESD3V3Z1BCSF-7, Arrow Price/Stock=https://www.arrow.com/en/products/desd3v3z1bcsf-7/diodes-incorporated?utm_currency=USD&region=nac, Datasheet Link=https://www.diodes.com/assets/Package-Files/X2-WLB0603-2.pdf, Height=0.32mm, Manufacturer_Part_Number=DESD3V3Z1BCSF-7, Mouser Price/Stock=https://www.mouser.co.uk/ProductDetail/Diodes-Incorporated/DESD3V3Z1BCSF-7?qs=HXFqYaX1Q2xS5VnKZuyjmg%3D%3D
D6: "TVS Diode (Bi-directional)", Manufacturer_Name="Diodes Incorporated", Mouser Part Number=621-SMBJ24CA-13-F, Arrow Part Number=SMBJ24CA-13-F, Arrow Price/Stock=https://www.arrow.com/en/products/smbj24ca-13-f/diodes-incorporated?utm_currency=USD&region=nac, Datasheet Link=https://www.diodes.com/assets/Datasheets/ds19002.pdf, Height=2.5mm, Manufacturer_Part_Number=SMBJ24CA-13-F, Mouser Price/Stock=https://www.mouser.co.uk/ProductDetail/Diodes-Incorporated/SMBJ24CA-13-F?qs=gaDBXWSqsDCkhBi9r6ReOQ%3D%3D
D7 D8 D9: library part 5990110007F, "Red 633nm LED Indication - Discrete 2.1V 0805 (2012 Metric)", Package="0805 Dialight", Availability="In Stock", Check_prices=https://www.snapeda.com/parts/599-0110-007F/Dialight/view-part/?ref=eda, MF=Dialight, MP=599-0110-007F, price=None, Purchase-URL=https://pricing.snapeda.com/search/part/599-0110-007F/?ref=eda, SnapEDA_Link=https://www.snapeda.com/parts/599-0110-007F/Dialight/view-part/?ref=snap
D10 D11 D12 D13 D14 D16 D17: "TVS Diode (Uni-directional)", Manufacturer_Name=STMicroelectronics, Datasheet Link=https://www.st.com/resource/en/datasheet/smbj12a.pdf, Height=2.45mm, Manufacturer_Part_Number=SMBJ5.0A
D15: "TVS Diode (Bi-directional)", Manufacturer_Name=DOWO, Datasheet Link=https://datasheet.lcsc.com/szlcsc/DOWO-SM712_C293966.pdf, Height=1.15mm, Manufacturer_Part_Number=SM712
IC1: "Integrated Circuit", Manufacturer_Name="Espressif Systems", Mouser Part Number=356-ESP32WRM32E164PH, Datasheet Link=https://www.google.com/url?sa=t&rct=j&q=&esrc=s&source=web&cd=&ved=2ahUKEwjLw4ysybv2AhXFzIUKHZUbB64QFnoECCwQAQ&url=https%3A%2F%2Fwww.espressif.com%2Fsites%2Fdefault%2Ffiles%2Fdocumentation%2Fesp32-wroom-32e_esp32-wroom-32ue_datasheet_en.pdf&usg=AOvVaw1xSL, Height=3.25mm, Manufacturer_Part_Number=ESP32-WROOM-32E-N8, Mouser Price/Stock=https://www.mouser.co.uk/ProductDetail/Espressif-Systems/ESP32-WROOM-32E-N8?qs=Li%252BoUPsLEnsLnZW%252BGLgUhw%3D%3D
IC2: library part LM74700-Q1MKX-1_NOPB, "Integrated Circuit", Manufacturer_Name="Texas Instruments", Manufacturer_Part_Number=LM74700-Q1MKX-1/NOPB, Datasheet Link=http://www.ti.com/lit/ds/symlink/lm74700-q1.pdf, Height=1.45mm
IC3: "Integrated Circuit", Manufacturer_Name="Diodes Incorporated", Mouser Part Number=621-AP2112K-1.2TRG1, Arrow Part Number=AP2112K-1.2TRG1, Arrow Price/Stock=https://www.arrow.com/en/products/ap2112k-1.2trg1/diodes-incorporated.html?utm_currency=USD&region=nac, Datasheet Link=https://www.diodes.com/assets/Datasheets/AP2112.pdf, Height=1.4mm, Manufacturer_Part_Number=AP2112K-1.2TRG1, Mouser Price/Stock=https://www.mouser.co.uk/ProductDetail/Diodes-Incorporated/AP2112K-1.2TRG1?qs=dZoB6MK9LKOx%252Blz%2FhgH2SA%3D%3D
IC4: "Integrated Circuit", Manufacturer_Name="Rochester Electronics", Datasheet Link=https://www.onsemi.com/pdf/datasheet/mmbt2222lt1-d.pdf, Height=1.11mm, Manufacturer_Part_Number=MMBT2222ALT1G
IC5: "Integrated Circuit", Manufacturer_Name="Analog Devices", Mouser Part Number=700-MAX485ECSA, Arrow Part Number=MAX485ECSA+, Arrow Price/Stock=https://www.arrow.com/en/products/max485ecsa/analog-devices?utm_currency=USD&region=nac, Datasheet Link=http://datasheets.maximintegrated.com/en/ds/MAX1487E-MAX491E.pdf, Height=1.75mm, Manufacturer_Part_Number=MAX485ECSA+, Mouser Price/Stock=https://www.mouser.co.uk/ProductDetail/Analog-Devices-Maxim-Integrated/MAX485ECSA%2b?qs=1THa7WoU59Gy3FCdT5o1Tg%3D%3D
IC6: "Integrated Circuit", Manufacturer_Name="Texas Instruments", Mouser Part Number=595-INA317IDGKR, Arrow Part Number=INA317IDGKR, Arrow Price/Stock=https://www.arrow.com/en/products/ina317idgkr/texas-instruments?utm_currency=USD&region=nac, Datasheet Link=http://www.ti.com/lit/gpn/ina317, Height=1.1mm, Manufacturer_Part_Number=INA317IDGKR, Mouser Price/Stock=https://www.mouser.co.uk/ProductDetail/Texas-Instruments/INA317IDGKR?qs=W0yvOO0ixfHq371pIwwl1g%3D%3D
IC7: "Integrated Circuit", Manufacturer_Name="Texas Instruments", Mouser Part Number=595-ADS1115IDGSR, Arrow Part Number=ADS1115IDGSR, Arrow Price/Stock=https://www.arrow.com/en/products/ads1115idgsr/texas-instruments.html?utm_currency=USD&region=nac, Datasheet Link=http://www.ti.com/lit/gpn/ADS1115, Height=1.1mm, Manufacturer_Part_Number=ADS1115IDGSR, Mouser Price/Stock=https://www.mouser.co.uk/ProductDetail/Texas-Instruments/ADS1115IDGSR?qs=IK5e5L0zOXjKCJoVMhYO%2FQ%3D%3D
J1: "USB Connectors 24 Receptacle 1 8.94*7.3mm RoHS", Package=Package, Check_prices=https://www.snapeda.com/parts/TYPE-C-31-M-12/HRO+Electronics+Co.%252C+Ltd./view-part/?ref=eda, MF="HRO Electronics Co., Ltd.", MP=TYPE-C-31-M-12, SnapEDA_Link=https://www.snapeda.com/parts/TYPE-C-31-M-12/HRO+Electronics+Co.%252C+Ltd./view-part/?ref=snap
J2 J7: library part B4B-XH-A(LF)(SN), "Connector Header Through Hole 4 position 0.098 (2.50mm)", Package=None, Check_prices=https://www.snapeda.com/parts/B4B-XH-A(LF)(SN)/JST+Sales+America+Inc./view-part/?ref=eda, MF="JST Sales", MP=B4B-XH-A(LF)(SN), SnapEDA_Link=https://www.snapeda.com/parts/B4B-XH-A(LF)(SN)/JST+Sales+America+Inc./view-part/?ref=snap
J3: library part 282815-3, "Connector", Manufacturer_Name="TE Connectivity", Mouser Part Number=571-282815-3, Arrow Part Number=282815-3, Arrow Price/Stock=https://www.arrow.com/en/products/282815-3/te-connectivity, Datasheet Link=https://www.te.com/commerce/DocumentDelivery/DDEController?Action=srchrtrv&DocNm=1-773958-1&DocType=Data%20Sheet&DocLang=English&PartCntxt=282815-3&DocFormat=pdf, Height=8.35mm, Manufacturer_Part_Number=282815-3, Mouser Price/Stock=https://www.mouser.co.uk/ProductDetail/TE-Connectivity/282815-3?qs=79%2FjLZ2kXkqd6grVMiPYfw%3D%3D
J4 J5: library part 282815-2, "Connector", Manufacturer_Name="TE Connectivity", Mouser Part Number=571-282815-2, Arrow Part Number=282815-2, Arrow Price/Stock=https://www.arrow.com/en/products/282815-2/te-connectivity?region=nac, Datasheet Link=https://www.te.com/commerce/DocumentDelivery/DDEController?Action=srchrtrv&DocNm=1-773958-1&DocType=Data%20Sheet&DocLang=English&PartCntxt=282815-2&DocFormat=pdf, Height=8.5mm, Manufacturer_Part_Number=282815-2, Mouser Price/Stock=https://www.mouser.co.uk/ProductDetail/TE-Connectivity/282815-2?qs=79%2FjLZ2kXkpF7MFURi982A%3D%3D
J6 J14 J15: "Connector", Manufacturer_Name="TE Connectivity", Mouser Part Number=571-282815-2, Arrow Part Number=282815-2, Arrow Price/Stock=https://www.arrow.com/en/products/282815-2/te-connectivity?region=nac, Datasheet Link=https://www.te.com/commerce/DocumentDelivery/DDEController?Action=srchrtrv&DocNm=1-773958-1&DocType=Data%20Sheet&DocLang=English&PartCntxt=282815-2&DocFormat=pdf, Height=8.5mm, Manufacturer_Part_Number=282815-2, Mouser Price/Stock=https://www.mouser.co.uk/ProductDetail/TE-Connectivity/282815-2?qs=79%2FjLZ2kXkpF7MFURi982A%3D%3D
J8: "6 Position Card Connector NANO SIM Surface Mount, Right Angle Gold", Package="Package Analog Devices", Availability=Unavailable, MF="Global Connector Technology", MP=SIM8060-6-1-14-00-A, price=None, SnapEDA_Link=https://www.snapeda.com/parts/SIM8060-6-1-14-00-A/Global%20Connector%20Technology/view-part/3075869/?ref=snap
J9: "Connector Header Through Hole 4 position 0.098 (2.50mm)", Package=None, Check_prices=https://www.snapeda.com/parts/B4B-XH-A(LF)(SN)/JST+Sales+America+Inc./view-part/?ref=eda, MF="JST Sales", MP=B4B-XH-A(LF)(SN), SnapEDA_Link=https://www.snapeda.com/parts/B4B-XH-A(LF)(SN)/JST+Sales+America+Inc./view-part/?ref=snap
J10: Package=None, Availability="In Stock", Check_prices=https://www.snapeda.com/parts/CONUFL001-SMD/Linx/view-part/5842340/?ref=eda, MF=Linx, MP=CONUFL001-SMD, price=None, SnapEDA_Link=https://www.snapeda.com/parts/CONUFL001-SMD/Linx/view-part/5842340/?ref=snap
J11 J12 J13: "Connector", Manufacturer_Name="TE Connectivity", Mouser Part Number=571-282815-3, Arrow Part Number=282815-3, Arrow Price/Stock=https://www.arrow.com/en/products/282815-3/te-connectivity, Datasheet Link=https://www.te.com/commerce/DocumentDelivery/DDEController?Action=srchrtrv&DocNm=1-773958-1&DocType=Data%20Sheet&DocLang=English&PartCntxt=282815-3&DocFormat=pdf, Height=8.35mm, Manufacturer_Part_Number=282815-3, Mouser Price/Stock=https://www.mouser.co.uk/ProductDetail/TE-Connectivity/282815-3?qs=79%2FjLZ2kXkqd6grVMiPYfw%3D%3D
L2 L3: "Inductor", Manufacturer_Name="Yageo Group", Mouser Part Number=673-PA4302.103NLT, Arrow Part Number=PA4302.103NLT, Arrow Price/Stock=https://www.arrow.com/en/products/pa4302.103nlt/pulse-electronics-corporation?region=nac, Datasheet Link=https://www.mouser.com/datasheet/2/336/-559356.pdf, Height=5.6mm, Manufacturer_Part_Number=PA4302.103NLT, Mouser Price/Stock=https://www.mouser.co.uk/ProductDetail/Pulse-Electronics/PA4302.103NLT?qs=ZU1dyKYMvyPXoPwo6qMOJg%3D%3D
LS1: "Loudspeaker or Buzzer", Manufacturer_Name="Same Sky", Mouser Part Number=490-CMI-1295IC-0585T, Arrow Part Number=CMI-1295IC-0585T, Arrow Price/Stock=https://www.arrow.com/en/products/cmi-1295ic-0585t/cui-devices?utm_currency=USD&region=nac, Datasheet Link=https://www.sameskydevices.com/product/resource/CMI-1295IC-0585T.pdf, Height=9.7mm, Manufacturer_Part_Number=CMI-1295IC-0585T, Mouser Price/Stock=https://www.mouser.co.uk/ProductDetail/Same-Sky/CMI-1295IC-0585T?qs=OlC7AqGiEDkuskN%2Fok3iNw%3D%3D
PS1 PS2: "Power Supply", Manufacturer_Name="Texas Instruments", Mouser Part Number=595-TPS54202DDCR, Arrow Part Number=TPS54202DDCR, Arrow Price/Stock=https://www.arrow.com/en/products/tps54202ddcr/texas-instruments?utm_currency=USD&region=nac, Datasheet Link=http://www.ti.com/lit/gpn/tps54202, Height=1.1mm, Manufacturer_Part_Number=TPS54202DDCR, Mouser Price/Stock=https://www.mouser.co.uk/ProductDetail/Texas-Instruments/TPS54202DDCR?qs=uP22XH7NdCsJtN%2Fq54jCtQ%3D%3D
Q1: "Integrated Circuit", Manufacturer_Name="Lattice Semiconductor", Mouser Part Number=N/A, Datasheet Link=https://media.digikey.com/pdf/Data%20Sheets/Diodes%20PDFs/DMG3415U.pdf, Height=1.1mm, Manufacturer_Part_Number=DMG3415U-7, Mouser Price/Stock=https://www.mouser.com/Search/Refine.aspx?Keyword=N%2FA
Q2: "MOSFET (N-Channel)", Manufacturer_Name=Infineon, Mouser Part Number=726-BSC014N06NSATMA1, Arrow Part Number=BSC014N06NSATMA1, Arrow Price/Stock=https://www.arrow.com/en/products/bsc014n06nsatma1/infineon-technologies-ag?region=nac, Datasheet Link=http://www.farnell.com/datasheets/1849651.html, Height=1.1mm, Manufacturer_Part_Number=BSC014N06NSATMA1, Mouser Price/Stock=https://www.mouser.co.uk/ProductDetail/Infineon-Technologies/BSC014N06NSATMA1?qs=K00xGehIljshgUA78G26tg%3D%3D
R1 R2 R13 R15: "Resistor", Manufacturer_Name=Vishay, Mouser Part Number=71-CRCW0402100KFKEDH, Arrow Part Number=CRCW0402100KFKEDHP, Arrow Price/Stock=https://www.arrow.com/en/products/crcw0402100kfkedhp/vishay?utm_currency=USD&region=nac, Datasheet Link=http://www.vishay.com/docs/20035/dcrcwe3.pdf, Height=0.4mm, Manufacturer_Part_Number=CRCW0402100KFKEDHP, Mouser Price/Stock=https://www.mouser.co.uk/ProductDetail/Vishay-Dale/CRCW0402100KFKEDHP?qs=k2%2FDWSARqgGFakjlJe4Ejw%3D%3D
R3 R4 R5 R6 R7 R8 R9 R10 R11 R12 R17 R18 R19 R20 R21 R29 R30 R31 R32 R34 R35 R36 R37 R38 R39 R40 R41 R42 R43: library part RES, "Resistor", Manufacturer_Name="UNI-ROYAL(Uniroyal Elec)", Manufacturer_Part_Number=0603WAF1001T5E, Datasheet Link=https://datasheet.lcsc.com/szlcsc/Uniroyal-Elec-0603WAF1001T5E_C21190.pdf, Height=0.55mm
R14: "Resistor", Manufacturer_Name=Vishay, Mouser Part Number=71-CRCW040216K9FKEDH, Datasheet Link=http://www.vishay.com/docs/20035/dcrcwe3.pdf, Height=0.4mm, Manufacturer_Part_Number=CRCW040216K9FKEDHP, Mouser Price/Stock=https://www.mouser.com/Search/Refine.aspx?Keyword=71-CRCW040216K9FKEDH
R16: "Resistor", Manufacturer_Name=Vishay, Mouser Part Number=N/A, Arrow Part Number=CRCW040213K7FKEDHP, Arrow Price/Stock=https://www.arrow.com/en/products/crcw040213k7fkedhp/vishay?region=nac, Datasheet Link=http://www.vishay.com/docs/20035/dcrcwe3.pdf, Height=0.4mm, Manufacturer_Part_Number=CRCW040213K7FKEDHP, Mouser Price/Stock=https://www.mouser.co.uk/ProductDetail/Vishay-Dale/CRCW040213K7FKEDHP?qs=VAB4DzKv5wWcbGmoe9QIoA%3D%3D
R22 R27 R28: library part RT0603FRE0710KL, "RES SMD 10K OHM 1% 1/10W 0603", Device Package="0603 (1608 Metric)", manufacturer=Yageo, Operating Temperature="-55°C ~ 155°C", Power (Watts)="0.1W, 1/10W", Resistance="10 kOhms", Supplier Device Package=0603, Supplier Part Number 1=YAG2321CT-ND, Temperature Coefficient=±50ppm/°C, Tolerance=±1%, componentlink1description=Datasheet, componentlink1url=https://www.yageo.com/upload/media/product/productsearch/datasheet/rchip/PYu-RT_1-to-0.01_RoHS_L_11.pdf, componentlink2description="DigiKey Link", componentlink2url=https://www.digikey.com/en/products/detail/yageo/RT0603FRE0710KL/1075040, Composition="Thin Film", Height - Seated (Max)="0.022\" (0.55mm)", lastupdated="9/19/2022 1:22:31 PM", Lifecycle Status=Active, Minimum Order=1, Number of Terminations=2, Package / Case="0603 (1608 Metric)", packaging=TapeAndReel, Part Number=RT0603FRE0710KL, Part Status=Active, partid=5671, price=0.01, series=RT, Size / Dimension="0.063\" L x 0.031\" W (1.60mm x 0.80mm)", Supplier 1=DigiKey
R23 R24 R25 R26 R33: library part RT0603FRE0710KL, "RES SMD 10K OHM 1% 1/10W 0603", Device Package="0603 (1608 Metric)", manufacturer=Yageo, Operating Temperature="-55°C ~ 155°C", Power (Watts)="0.1W, 1/10W", Supplier Device Package=0603, Supplier Part Number 1=YAG2321CT-ND, Temperature Coefficient=±50ppm/°C, Tolerance=±1%, componentlink1description=Datasheet, componentlink1url=https://www.yageo.com/upload/media/product/productsearch/datasheet/rchip/PYu-RT_1-to-0.01_RoHS_L_11.pdf, componentlink2description="DigiKey Link", componentlink2url=https://www.digikey.com/en/products/detail/yageo/RT0603FRE0710KL/1075040, Composition="Thin Film", Height - Seated (Max)="0.022\" (0.55mm)", lastupdated="9/19/2022 1:22:31 PM", Lifecycle Status=Active, Minimum Order=1, Number of Terminations=2, Package / Case="0603 (1608 Metric)", packaging=TapeAndReel, Part Number=RT0603FRE0710KL, Part Status=Active, partid=5671, price=0.01, Resistance="10 kOhms", series=RT, Size / Dimension="0.063\" L x 0.031\" W (1.60mm x 0.80mm)", Supplier 1=DigiKey
S1 S2: "Tactile Switch SPST-NO Top Actuated Surface Mount", Package=None, Availability="In Stock", Check_prices=https://www.snapeda.com/parts/PTS526%20SMG15%20SMTR2%20LFS/C%2526K/view-part/?ref=eda, MF=C&K, MP="PTS526 SMG15 SMTR2 LFS", price=None, Purchase-URL="https://pricing.snapeda.com/search/part/PTS526 SMG15 SMTR2 LFS/?ref=eda", SnapEDA_Link=https://www.snapeda.com/parts/PTS526%20SMG15%20SMTR2%20LFS/C%2526K/view-part/?ref=snap
U1: "USB to serial chip CH340", Package=None, Availability="Not in stock", Check_prices=https://www.snapeda.com/parts/CH340C/WCH/view-part/?ref=eda, MF=WCH, MP=CH340C, price=None, SnapEDA_Link=https://www.snapeda.com/parts/CH340C/WCH/view-part/?ref=snap
U2: "Module: GSM/Bluetooth; GPRS; 2G; 1800MHz, 900MHz; 85.6kbps; SMD", Package=None, Availability="In Stock", Check_prices=https://www.snapeda.com/parts/SIM800C/SIMcom+Wireless+solutions+Co.%252CLtd/view-part/?ref=eda, MF=Simcom, MP=SIM800C, price=None, SnapEDA_Link=https://www.snapeda.com/parts/SIM800C/SIMcom+Wireless+solutions+Co.%252CLtd/view-part/?ref=snap
Y1: "Tuning Fork Crystal 32.768kHz in SMD 1.2 x 2.0mm package", Package="SMD-2 Micro Crystal", Check_prices=https://www.snapeda.com/parts/CM8V-T1A-32.768kHz-6pF-20PPM-TA-QC/Micro+Crystal/view-part/?ref=eda, MF="Micro Crystal", MP=CM8V-T1A-32.768kHz-6pF-20PPM-TA-QC, SnapEDA_Link=https://www.snapeda.com/parts/CM8V-T1A-32.768kHz-6pF-20PPM-TA-QC/Micro+Crystal/view-part/?ref=snap

## Free pads (board coordinates)
  round 236.22 hole 118.11: 2(1175,1175) 2(1175,4825) 2(5075,1175) 2(5075,4825)

## Via types
v1: diameter 23.62, hole 11.81, Top Layer to Bottom Layer, 324 vias
v2: diameter 39.37, hole 19.68, Top Layer to Bottom Layer, 1 vias
v3: diameter 78.74, hole 39.37, Top Layer to Bottom Layer, 1 vias
v4: diameter 19.68, hole 9.84, Top Layer to Bottom Layer, 1 vias

## Nets (pads, with @x,y where several pads share a name; then routed paths per layer and width w, separated by ;. In a path a pad name is that pad's centre, name@x,y a point inside that pad or via, vN(x,y) a via of type N, cw(c..) or ccw(c..) an arc to the next point about the centre after c; other vN are vias at no path point)
+3.3: C3.1 C12.1 C32.1 C34.P IC1.2 IC3.5 IC6.7 J2.3 J3.3 R3.2 R4.2 R5.2 R6.2 R7.2 R9.2 R10.2 R23.2 R24.2 R25.2 R26.2 R37.1 R38.1 R42.2 | length 13475.2
  Top Layer w5: v1(1353,3420) 1353,3416 1387.5,3381.5 R5.2@1430,3381.5 ; v1(2036,1793) 2094.5,1793 R37.1@2100,1798.5 ; v1(2163,2054) 2165,2052 R38.1@2165,1987.99 ; 2598,4729.62 2600,4727.62 v1(2600,4389) ; v1(2751,4392) 2814.3,4392 2814.41,4392.11 R26.2@2814.41,4432 ; R24.2@2813.41,4190 2814.41,4191 2814.41,4392 ; R42.2@3012,2173.5 3038.5,2173.5 3059,2153 v1(3059,2126) ; IC6.7@3022.2,2016.61 3022.2,1977.2 3020,1975 3020,1955 v1(3042,1933) ; R3.2@3952.01,4890 3952.01,4938.95 3942,4948.96 v1(3942,4954) 3970.62,4982.62 4375.38,4982.62 4424,4934 4424,4890.5 R4.2@4423.5,4890
  Top Layer w10: J2.3@1165,3123.43 1393.94,3123.43 1429.02,3158.5 R6.2@1430,3158.5 ; J3.3@1231.97,1605 1234.29,1607.32 1234.29,1664.29 1338.5,1768.5 R7.2@1385,1768.5 ; v1(3042,1933) 3107,1933 3129.38,1910.62 C32.1@3169,1910.62
  Top Layer w20: IC3.5@2446.4,4724.82 2446.4,4725.41 2448.21,4727.22 2526.6,4727.22 C12.1@2529,4729.62 2598,4729.62 2723.52,4729.62 C34.P@2803.9,4810 2978,4810 2992.5,4824.5 ; C3.1@2990,4893.62 2990,4827 2992.5,4824.5 ; IC1.2@3134.45,4878.94 3127.39,4886 3054,4886 2992.5,4824.5 ; R10.2@3405,1626.5 3458.52,1626.5 3477.02,1645 v1(3478,1645) ; R9.2@3810,1626.5 3893.52,1626.5 3915.02,1605 v1(3916,1605)
  Bottom Layer w5: v1(1353,3420) 1428,3420 1429,3421 ; v1(2036,1793) 2036,1795 2163,1922 v1(2163,2054) ; v1(2600,4389) 2601.5,4390.5 2749.5,4390.5 v1(2751,4392) ; C34.P@2803.9,4810 2947.9,4954 v1(3942,4954)
  Bottom Layer w10: J2.3@1165,3123.43 1427.57,3123.43 1429,3122 ; 3011,1933 v1(3042,1933)
  Bottom Layer w20: v1(2036,1793) 2036,1612.72 2028.28,1605 ; C34.P@2803.9,4810 2701.9,4912 1761,4912 1429,4580 1429,3421 1429,3122 1429,1802.03 J3.3@1231.97,1605 2028.28,1605 ; v1(3059,2126) 3011,2078 3011,1933 3011,1605 ; v1(3478,1645) 3478.69,1644.31 3478.69,1605.31 3479,1605 ; v1(3916,1605) 3479,1605 ; 2028.28,1605 3011,1605 ; 3011,1605 3479,1605
+4.1V: C18.2 C19.2 C26.P C27.P J7.4 L2.2 R13.2 U2.34 U2.35 | length 3480.6
  Top Layer w5: L2.2@3611.98,3719 3676.51,3719 3720.02,3675.5 R13.2@3721,3675.5 C18.2@3783.32,3675.5 ; C19.2@3761,3771.64 3761,3697.82 C18.2@3783.32,3675.5 ; C18.2@3791,3670.38 3788.44,3670.38 C18.2@3783.32,3675.5
  Top Layer w40: v3(3608,3943) 3608,3798 3619,3787 ; U2.35@4474.92,3550.39 U2.34@4518.23,3550.39 4560.39,3550.39 4665,3655 C26.P@4665,3836.1 4666.95,3838.05 5018.05,3838.05 C27.P@5020,3840
  Bottom Layer w40: v3(3608,3943) 3714.9,3836.1 C26.P@4665,3836.1 5016.1,3836.1 C27.P@5020,3840 5080,3840 5150,3770 5150,3228.31 J7.4@5089.33,3167.64